# EAGLE board design1 (EAGLE 6.5.0)
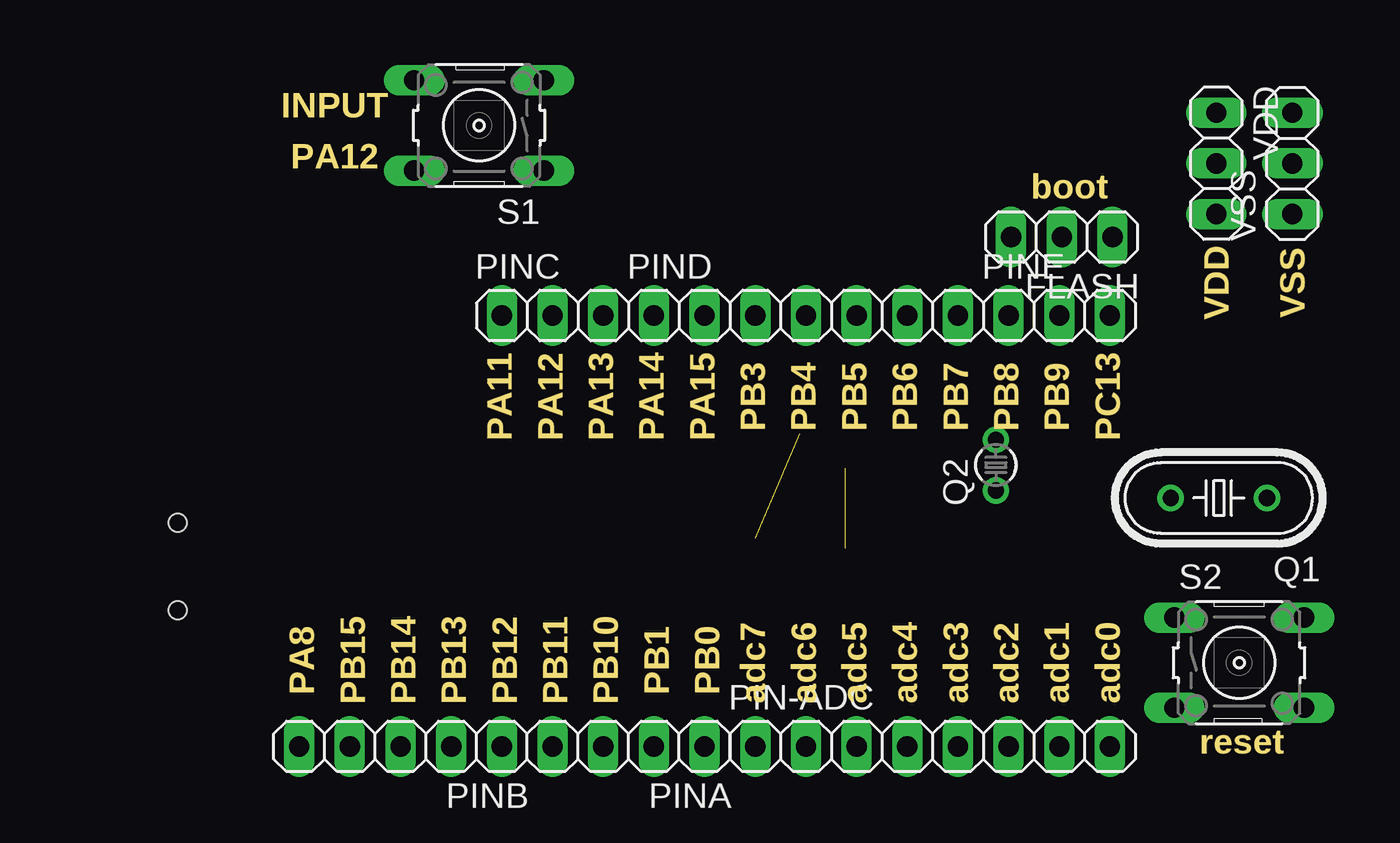
[diagram p0: board, top side]
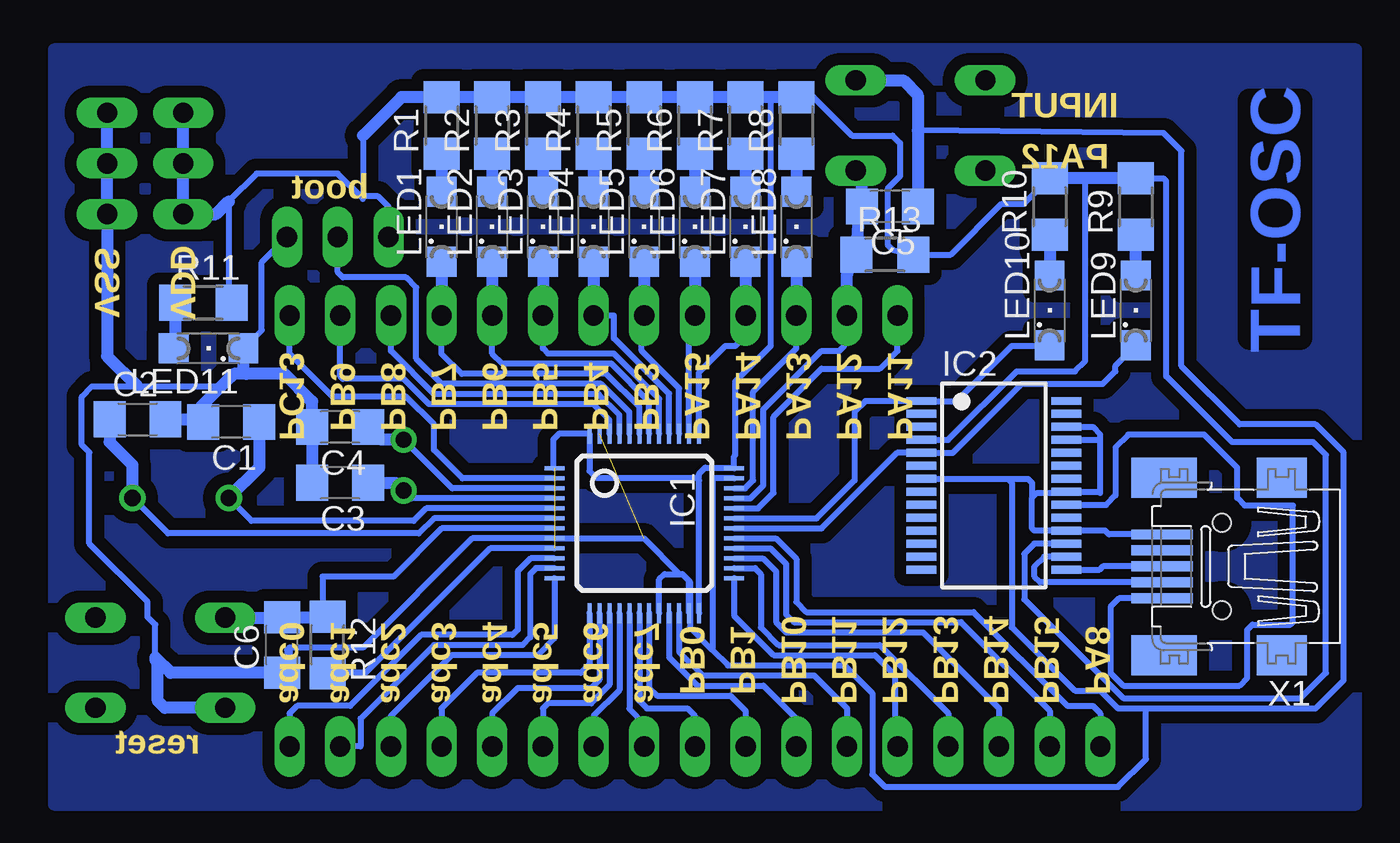
[diagram p1: board, bottom side, seen from below]

No outline drawn. Coordinates in mm, seen from the top.
Copper layers (1*16): Top 0.035mm / dielectric 1.5mm / Bottom 0.035mm
Design rules "default": minimum track width 10mil, minimum drill 24mil, track to track 8mil, track to pad 8mil, pad to pad 8mil, via to via 8mil, smd to smd 8mil, copper to edge 40mil, drill to drill 8mil, minimum pad ring 10mil, minimum via ring 8mil, stop-mask expansion 4mil, vias tented up to drill 0mil, thermal gap 10mil

## Footprints (pad centres in the part's own frame; a part is rotated, then mirrored left to right if it is on the bottom)
C1206 = smd 1.6 x 1.8: 1 -1.4,0; 2 1.4,0
1X03 = drill 1.016 long: 1 -2.54,0; 2 0,0; 3 2.54,0
TQFP48 = smd 0.2 x 1: 1 -2.75,-4.5; 2 -2.25,-4.5; 3 -1.75,-4.5; 4 -1.25,-4.5; 5 -0.75,-4.5; 6 -0.25,-4.5; 7 0.25,-4.5; 8 0.75,-4.5; 9 1.25,-4.5; 10 1.75,-4.5; 11 2.25,-4.5; 12 2.75,-4.5; 25 2.75,4.5; 26 2.25,4.5; 27 1.75,4.5; 28 1.25,4.5; 29 0.75,4.5; 30 0.25,4.5; 31 -0.25,4.5; 32 -0.75,4.5; 33 -1.25,4.5; 34 -1.75,4.5; 35 -2.25,4.5; 36 -2.75,4.5 | smd 1 x 0.2: 13 4.5,-2.75; 14 4.5,-2.25; 15 4.5,-1.75; 16 4.5,-1.25; 17 4.5,-0.75; 18 4.5,-0.25; 19 4.5,0.25; 20 4.5,0.75; 21 4.5,1.25; 22 4.5,1.75; 23 4.5,2.25; 24 4.5,2.75; 37 -4.5,2.75; 38 -4.5,2.25; 39 -4.5,1.75; 40 -4.5,1.25; 41 -4.5,0.75; 42 -4.5,0.25; 43 -4.5,-0.25; 44 -4.5,-0.75; 45 -4.5,-1.25; 46 -4.5,-1.75; 47 -4.5,-2.25; 48 -4.5,-2.75
SSOP28 = smd 0.4 x 1.5: 1 -4.225,-3.625; 2 -3.575,-3.625; 3 -2.925,-3.625; 4 -2.275,-3.625; 5 -1.625,-3.625; 6 -0.975,-3.625; 7 -0.325,-3.625; 8 0.325,-3.625; 9 0.975,-3.625; 10 1.625,-3.625; 11 2.275,-3.625; 12 2.925,-3.625; 13 3.575,-3.625; 14 4.225,-3.625; 15 4.225,3.625; 16 3.575,3.625; 17 2.925,3.625; 18 2.275,3.625; 19 1.625,3.625; 20 0.975,3.625; 21 0.325,3.625; 22 -0.325,3.625; 23 -0.975,3.625; 24 -1.625,3.625; 25 -2.275,3.625; 26 -2.925,3.625; 27 -3.575,3.625; 28 -4.225,3.625
SML1206 = smd 1.5 x 1.5: A 1.75,0; C -1.75,0
1X08 = drill 1.016 long: 1 -8.89,0; 2 -6.35,0; 3 -3.81,0; 4 -1.27,0; 5 1.27,0; 6 3.81,0; 7 6.35,0; 8 8.89,0
1X04 = drill 1.016 long: 1 -3.81,0; 2 -1.27,0; 3 1.27,0; 4 3.81,0
1X05 = drill 1.016 long: 1 -5.08,0; 2 -2.54,0; 3 0,0; 4 2.54,0; 5 5.08,0
1X07 = drill 1.016 long: 1 -7.62,0; 2 -5.08,0; 3 -2.54,0; 4 0,0; 5 2.54,0; 6 5.08,0; 7 7.62,0
HC49U-V = drill 0.813: 1 -2.413,0; 2 2.413,0
TC26V = drill 0.813: 1 -1.27,0; 2 1.27,0
R1206 = smd 1.6 x 1.803: 1 -1.422,0; 2 1.422,0
B3F-10XX = drill 1.016 long: 1 -3.251,2.261; 2 3.251,2.261; 3 -3.251,-2.261; 4 3.251,-2.261
32005-201 = smd 3.1 x 0.5: 1 3,1.6; 2 3,0.8; 3 3,0; 4 3,-0.8; 5 3,-1.6 | smd 2.5 x 2: M1 -3,-4.45; M2 -3,4.45 | smd 3.3 x 2: M3 2.9,4.45; M4 2.9,-4.45 | hole 0.9: 0,2.2; 0,-2.2

## Placement (x,y rotation side)
C1  22pf  [C1206]  68.96,53.09 180 bottom
C2  22pf  [C1206]  73.66,53.21 0 bottom
C3  22pf  [C1206]  63.5,50.04 180 bottom
C4  22pf  [C1206]  63.5,52.83 180 bottom
C5  22pf  [C1206]  35.94,63.88 180 bottom
C6  22pf  [C1206]  66.42,41.91 90 bottom
FLASH  [1X03]  63.63,62.36 180 top
IC1  STM32F10XCXT6  [TQFP48]  48.26,48.01 270 bottom
IC2  FT232RL  [SSOP28]  30.73,49.91 270 bottom
LED1  [SML1206]  58.42,62.87 90 bottom
LED2  [SML1206]  55.88,62.87 90 bottom
LED3  [SML1206]  53.34,62.87 90 bottom
LED4  [SML1206]  50.8,62.87 90 bottom
LED5  [SML1206]  48.26,62.87 90 bottom
LED6  [SML1206]  45.72,62.87 90 bottom
LED7  [SML1206]  43.18,62.87 90 bottom
LED8  [SML1206]  40.64,62.87 90 bottom
LED9  [SML1206]  23.62,58.67 90 bottom
LED10  [SML1206]  27.94,58.67 90 bottom
LED11  [SML1206]  70.1,56.77 180 bottom
PIN-ADC  [1X08]  57.15,36.83 0 top
PINA  [1X04]  41.91,36.83 180 top
PINB  [1X05]  30.48,36.83 180 top
PINC  [1X03]  38.1,58.42 0 top
PIND  [1X07]  50.8,58.42 0 top
PINE  [1X03]  63.5,58.42 0 top
Q1  8mhz  [HC49U-V]  71.5,49.28 180 top
Q2  32khz  [TC26V]  60.33,50.93 90 top
R1  330  [R1206]  58.42,67.94 90 bottom
R2  330  [R1206]  55.88,67.94 90 bottom
R3  330  [R1206]  53.34,67.94 90 bottom
R4  330  [R1206]  50.8,67.94 90 bottom
R5  330  [R1206]  48.26,67.94 90 bottom
R6  330  [R1206]  45.72,67.94 90 bottom
R7  330  [R1206]  43.18,67.94 90 bottom
R8  330  [R1206]  40.64,67.94 90 bottom
R9  330  [R1206]  23.62,63.88 90 bottom
R10  330  [R1206]  27.94,63.88 90 bottom
R11  330  [R1206]  70.36,59.05 0 bottom
R12  4k7  [R1206]  64.14,41.91 270 bottom
R13  4k7  [R1206]  36.2,61.47 0 bottom
S1  [B3F-10XX]  34.42,67.94 180 top
S2  [B3F-10XX]  72.52,41.02 0 top
VDD  [1X03]  71.37,66.04 270 top
VSS  [1X03]  75.18,66.04 90 top
X1  MINI-USB-32005-201  [32005-201]  19.3,45.85 180 bottom

## Library data of the parts
C1-C6 R1-R13 = resistor
FLASH PIN-ADC PINA PINB PINC PIND PINE VDD VSS = pinhead
IC1 = stm32
IC2 = ftdichip; MPN: FT232RL; OC_FARNELL: 1146032; OC_NEWARK: 91K9918
LED1-LED11 = led
Q1 = crystal; OC_FARNELL: 1666969; OC_NEWARK: unknown
Q2 = crystal; OC_FARNELL: unknown; OC_NEWARK: unknown
S1 S2 = switch-omron; MPN: B3F-1000; OC_FARNELL: 176432; OC_NEWARK: 36M3542
X1 = con-cypressindustries; OC_FARNELL: unknown; OC_NEWARK: unknown

## Nets
ADC0: IC1.10 PIN-ADC.8
ADC1: IC1.11 PIN-ADC.7
ADC2: IC1.12 PIN-ADC.6
ADC3: IC1.13 PIN-ADC.5
ADC4: IC1.14 PIN-ADC.4
ADC5: IC1.15 PIN-ADC.3
ADC6: IC1.16 PIN-ADC.2
ADC7: IC1.17 PIN-ADC.1
DM: IC2.16 X1.2
DP: IC2.15 X1.3
N$9: C1.1 IC1.5 Q1.2
N$10: C2.1 IC1.6 Q1.1
N$11: C3.1 IC1.4 Q2.1
N$12: C4.1 IC1.3 Q2.2
N$13: FLASH.2 IC1.44
N$14: LED1.A R1.1
N$15: LED2.A R2.1
N$16: LED3.A R3.1
N$17: LED4.A R4.1
N$18: LED5.A R5.1
N$19: LED6.A R6.1
N$20: LED7.A R7.1
N$21: LED8.A R8.1
N$22: LED9.A R9.1
N$23: LED10.A R10.1
N$24: LED11.A R11.1
NRST: C6.2 IC1.7 R12.1 S2.1
PA8: IC1.29 PINB.5
PA11: IC1.32 PINC.1
PA12: C5.2 IC1.33 PINC.2 R13.1 S1.1
PA13: IC1.34 LED8.C PINC.3
PA14: IC1.37 LED7.C PIND.1
PA15: IC1.38 LED6.C PIND.2
PB0: IC1.18 PINA.1
PB1: IC1.19 PINA.2
PB3: IC1.39 LED5.C PIND.3
PB4: IC1.40 LED4.C PIND.4
PB5: IC1.41 LED3.C PIND.5
PB6: IC1.42 LED2.C PIND.6
PB7: IC1.43 LED1.C PIND.7
PB8: IC1.45 PINE.1
PB9: IC1.46 PINE.2
PB10: IC1.21 PINA.3
PB11: IC1.22 PINA.4
PB12: IC1.25 PINB.1
PB13: IC1.26 PINB.2
PB14: IC1.27 PINB.3
PB15: IC1.28 PINB.4
PC13: IC1.2 PINE.3
RX: IC1.31 IC2.1 LED10.C
TX: IC1.30 IC2.5 LED9.C
VCC: IC2.20 X1.1
VDD: FLASH.3 IC1.1 IC1.9 IC1.24 IC1.36 IC1.48 IC2.4 IC2.17 R1.2 R2.2 R3.2 R4.2 R5.2 R6.2 R7.2 R8.2 R9.2 R10.2 R11.2 R12.2 R13.2 VDD.1 VDD.2 VDD.3
VSS: C1.2 C2.2 C3.2 C4.2 C5.1 C6.1 FLASH.1 IC1.8 IC1.20 IC1.23 IC1.35 IC1.47 IC2.7 IC2.18 IC2.21 IC2.25 IC2.26 LED11.C S1.3 S2.3 VSS.1 VSS.2 VSS.3 X1.5

## Tracks (layer width: path | path; a pad name or v marks a point on that pad's centre or on a via)
ADC0
  Bottom 0.305: IC1.10 53.95,46.26 54.61,45.59 54.61,42.67 54.86,42.42 59.44,42.42 62.99,38.86 65.66,38.86 66.04,38.48 PIN-ADC.8
ADC1
  Bottom 0.305: IC1.11 53.69,45.76 53.98,45.47 53.98,42.29 54.36,41.91 58.8,41.91 62.48,38.23 62.48,36.83 PIN-ADC.7
ADC2
  Bottom 0.305: IC1.12 52.76,42.24 53.59,41.4 57.91,41.4 60.96,38.35 PIN-ADC.6
ADC3
  Bottom 0.305: IC1.13 51.01,40.94 51.44,40.51 56.64,40.51 58.42,38.73 PIN-ADC.5
ADC4
  Bottom 0.305: IC1.14 50.51,40.17 50.93,39.75 54.61,39.75 55.88,38.48 PIN-ADC.4
ADC5
  Bottom 0.305: IC1.15 50.01,39.91 50.93,38.99 53.09,38.99 53.34,38.73 PIN-ADC.3
ADC6
  Bottom 0.305: IC1.16 49.51,39.64 50.8,38.35 PIN-ADC.2
ADC7
  Bottom 0.305: IC1.17 49.01,38.72 48.26,37.97 PIN-ADC.1
DM
  Bottom 0.305: IC2.16 28.21,46.34 28.7,45.85 28.7,45.34 28.41,45.05 X1.2
DP
  Bottom 0.305: IC2.15 25.43,45.69 25.27,45.85 X1.3
N$1
  pour Bottom (isolate 0.61): 12.57,71.75 77.85,71.75 77.85,33.91 12.57,33.91
N$9
  Bottom 0.305: IC1.5 59.19,48.76 59.82,48.13 67.94,48.13 Q1.2
  Bottom 0.61: C1.1 67.56,50.8 Q1.2
N$10
  Bottom 0.305: IC1.6 58.8,48.26 59.56,47.5 72.14,47.5 Q1.1
  Bottom 0.61: Q1.1 73.91,50.93 75.06,52.07 C2.1
N$11
  Bottom 0.305: IC1.4 59.92,49.26 Q2.1
  Bottom 0.61: C3.1 60.71,50.04 Q2.1
N$12
  Bottom 0.305: IC1.3 57.88,49.76 Q2.2
  Bottom 0.61: Q2.2 61.47,52.2 C4.1
N$13
  Bottom 0.305: IC1.44 49.01,53.58 50.42,54.99 58.42,54.99 59.69,56.26 59.69,59.82 60.2,60.33 63.37,60.33 63.63,60.58 FLASH.2
N$14
  Bottom 0.61: R1.1 58.42,64.77 57.91,64.26 58.07,64.26 LED1.A
N$15
  Bottom 0.61: R2.1 LED2.A
N$16
  Bottom 0.61: R3.1 LED3.A
N$17
  Bottom 0.61: R4.1 LED4.A
N$18
  Bottom 0.61: R5.1 LED5.A
N$19
  Bottom 0.61: R6.1 LED6.A
N$20
  Bottom 0.61: R7.1 LED7.A
N$21
  Bottom 0.61: R8.1 LED8.A
N$22
  Bottom 0.61: LED9.A R9.1
N$23
  Bottom 0.61: R10.1 LED10.A
N$24
  Bottom 0.61: R11.1 71.78,56.84 LED11.A
NRST
  Bottom 0.305: IC1.7 58.42,47.76 60.83,45.34 64.39,45.34 64.39,43.59 R12.1
  Bottom 0.61: R12.1 64.16,43.31 C6.2 66.47,43.26 69.24,43.26 S2.1
PA8
  Bottom 0.305: IC1.29 41.67,47.26 40.64,46.23 40.64,44.07 40.13,43.56 31.75,43.56 27.05,38.86 25.78,38.86 25.4,38.48 PINB.5
PA11
  Bottom 0.305: IC1.32 42.56,48.76 41.78,49.53 41.78,53.34 39.37,55.75 36.45,55.75 35.56,56.64 PINC.1
PA12
  Bottom 0.305: IC1.33 42.95,49.26 42.29,49.91 42.29,53.72 39.37,56.64 38.48,56.64 38.23,56.9 38.23,58.29 PINC.2
  Bottom 0.61: PINC.2 38.1,60.48 R13.1 37.49,63.35 C5.2 37.34,65.36 S1.1
PA13
  Bottom 0.305: IC1.34 43.21,49.76 42.8,50.16 42.8,54.61 40.64,56.77 PINC.3
  Bottom 0.61: LED8.C PINC.3
PA14
  Bottom 0.305: IC1.37 45.51,55.58 44.2,56.9 43.69,56.9 43.18,57.4 PIND.1
  Bottom 0.61: LED7.C PIND.1
PA15
  Bottom 0.305: IC1.38 46.01,58.13 PIND.2
  Bottom 0.61: LED6.C PIND.2
PB0
  Bottom 0.305: IC1.18 48.51,39.11 48.13,38.73 46.1,38.73 45.72,38.35 PINA.1
PB1
  Bottom 0.305: IC1.19 48.01,39.76 47.62,39.37 43.94,39.37 43.18,38.61 PINA.2
PB3
  Bottom 0.305: IC1.39 46.51,54.77 48.39,56.64 48.39,58.29 PIND.3
  Bottom 0.61: LED5.C PIND.3
PB4
  Bottom 0.305: IC1.40 47.01,54.5 49.78,57.28 49.78,58.42 PIND.4
  Bottom 0.61: LED4.C PIND.4
PB5
  Bottom 0.305: IC1.41 47.51,54.24 49.78,56.52 53.09,56.52 53.34,56.77 PIND.5
  Bottom 0.61: LED3.C PIND.5
PB6
  Bottom 0.305: IC1.42 48.01,54.11 49.91,56.01 55.37,56.01 55.88,56.52 PIND.6
  Bottom 0.61: LED2.C PIND.6
PB7
  Bottom 0.305: IC1.43 48.51,53.84 50.16,55.5 57.4,55.5 58.42,56.52 PIND.7
  Bottom 0.61: LED1.C PIND.7
PB8
  Bottom 0.305: IC1.45 49.51,53.45 50.55,54.48 58.8,54.48 60.96,56.64 PINE.1
PB9
  Bottom 0.305: IC1.46 50.01,53.19 50.8,53.98 59.05,53.98 60.33,55.24 63.37,55.24 63.5,55.37 PINE.2
PB10
  Bottom 0.305: IC1.21 47.01,41.3 45.59,39.88 42.29,39.88 40.64,38.23 PINA.3
PB11
  Bottom 0.305: IC1.22 46.51,41.56 45.34,40.39 39.75,40.39 38.1,38.73 PINA.4
PB12
  Bottom 0.305: IC1.25 43.76,43.38 41.78,41.4 36.7,41.4 35.69,40.39 35.69,36.96 PINB.1
PB13
  Bottom 0.305: IC1.26 42.71,45.76 42.42,45.47 42.42,42.8 41.53,41.91 36.45,41.91 33.02,38.48 PINB.2
PB14
  Bottom 0.305: IC1.27 42.32,46.26 41.66,45.59 41.66,43.05 41.15,42.55 34.29,42.55 30.48,38.73 PINB.3
PB15
  Bottom 0.305: IC1.28 41.93,46.76 41.15,45.97 41.15,43.43 40.77,43.05 32.38,43.05 27.94,38.61 PINB.4
PC13
  Bottom 0.305: IC1.2 57.37,50.26 58.8,51.69 58.8,52.96 60.2,54.36 63.88,54.36 66.04,56.52 PINE.3
RX
  Bottom 0.305: IC1.31 39.63,48.26 37.72,50.16 37.72,53.59 37.18,54.14 IC2.1 32.6,54.14 29.84,56.9 27.97,56.9 LED10.C
TX
  Bottom 0.305: IC1.30 39.37,47.76 35.59,51.54 IC2.5 32.79,51.54 29.34,54.99 25.27,54.99 24.64,55.63 24.64,55.91 LED9.C
VCC
  Bottom 0.305: X1.1 24.46,44.25 24.89,43.81 24.89,40.51 24.26,39.88 18.41,39.88 18.03,40.26 18.03,42.67 17.78,42.93 15.88,42.93 15.75,43.05 15.75,48.9 18.16,48.9 18.54,49.28 18.54,50.8 20.19,52.45 24,52.45 24.64,51.82 24.64,49.4 25.11,48.94 IC2.20
VDD  (1 unrouted)
  Bottom 0.305: IC2.4 33.03,52.19 29.59,55.63 26.67,55.63 26.16,56.13 26.16,65.3 | IC1.9 55.99,46.76 62.23,40.51 64.11,40.51 R12.2 | IC2.17 28.71,46.99 29.21,46.48 29.21,44.2 24.26,39.24 15.37,39.24 14.1,40.51 14.1,51.44 14.73,52.07 18.8,52.07 22.1,55.37 22.1,65.15 22.23,65.28 23.6,65.28 R9.2 | R8.2 39.78,69.37 37.85,67.44 35.81,67.44 35.43,67.06 35.43,65.41 36.07,64.77 36.07,61.98 35.81,61.72 R13.2 32.89,61.47 30.35,64.01 29.23,64.01 R10.2 | IC1.1 52.83,50.83 52.83,52.2 52.52,52.51 IC1.48 51.01,50.63 50.67,50.29 45.64,50.29 45.51,50.16 | 41.91,69.37 41.91,56.9 43.69,55.12 43.69,51.44 43.76,51.36 IC1.36 43.8,50.8 45.21,50.8 45.51,50.5 45.51,50.16 | IC1.24 45.51,50.16 | R11.2 69.09,59.21 69.09,64.14 67.69,65.53 63.63,65.53 62.36,64.26 62.36,64.39 | 62.36,67.44 62.36,64.39 | FLASH.3 61.09,63.88 61.59,64.39 62.36,64.39
  Bottom 0.61: R8.2 41.91,69.37 R7.2 R6.2 R5.2 R4.2 R3.2 R2.2 R1.2 60.43,69.37 62.36,67.44 | R9.2 26.16,65.3 R10.2 | VDD.1 VDD.2 VDD.3 69.72,63.5 69.09,64.14
VSS  (1 unrouted)
  Bottom 0.305: IC1.23 46.01,45.12 | IC1.20 47.51,45.2 47.24,45.47 46.48,45.47 | 66.04,41.78 62.36,41.78 56.88,47.26 IC1.8 48.27,47.26 46.48,45.47 | 66.04,41.78 66.17,41.66 66.17,40.76 C6.1 | 66.04,41.78 66.04,41.02 66.42,40.64 72.26,40.64 72.77,41.15 72.77,42.93 73.15,43.31 73.15,44.07 76.07,46.99 76.07,51.56 76.45,51.94 76.45,54.36 75.95,54.86 73.66,54.86 69.47,54.86 68.96,55.37 | X1.5 24.97,47.45 25.16,47.64 IC2.18 28.71,47.64 28.83,47.75 28.83,49.28 | 25.4,52.2 25.4,49.53 25.46,49.59 IC2.21 27.16,49.53 28.57,49.53 28.83,49.28 | 25.4,52.2 25.4,52.45 25.79,52.84 IC2.26 | IC2.25 25.41,52.19 25.4,52.2 | 28.83,49.28 28.83,50.04 29.03,50.24 IC2.7 30.04,50.24 29.84,50.04 29.84,42.8 26.67,39.62 25.4,39.62 24.51,38.73 23.11,38.73 | 34.54,67.69 22.23,67.56 21.34,66.67 21.34,55.88 18.41,52.96 14.61,52.96 13.21,51.56 13.21,40.13 14.61,38.73 23.11,38.73 | LED11.C 67.44,57.69 67.44,61.09 FLASH.1 | 46.48,45.47 46.35,45.47 46.01,45.12 | 46.01,45.12 45.97,45.09 45.97,42.8 44.83,41.66 | 44.83,41.66 44.07,40.89 38.23,40.89 36.83,39.5 36.83,35.43 36.2,34.8 24.51,34.8 23.11,36.2 23.11,38.73 | IC1.35 44.74,50.26 44.83,50.16 44.83,41.66
  Bottom 0.61: C2.2 70.49,53.21 | 70.49,53.21 C1.2 | C3.2 C4.2 64.9,54.1 66.29,55.5 68.2,55.5 | C6.1 72.01,40.51 72.77,41.27 | 68.2,55.5 68.83,55.5 68.96,55.37 70.49,53.84 70.49,53.21 | LED11.C 68.35,55.65 68.2,55.5 | S1.3 35.28,70.21 34.54,69.47 34.54,67.69 34.54,63.5 C5.1 | VSS.3 VSS.2 VSS.1 75.18,56.39 73.66,54.86 | S2.3 72.29,38.76 72.64,39.12 72.64,41.02 72.77,41.15

## Text on the board
Bottom: TF-OSC
Dimension: INPUT / PA12 | boot | VDD | VSS | PA11 / PA12 / PA13 / PA14 / PA15 / PB3 / PB4 / PB5 / PB6 / PB7 / PB8 / PB9 / PC13 | PA8 / PB15 / PB14 / PB13 / PB12 / PB11 / PB10 / PB1 / PB0 | adc7 / adc6 / adc5 / adc4 / adc3 / adc2 / adc1 / adc0 | reset